# Altium PCB PCB_CONTROL.PcbDoc (part 4 of 15)
Units mil, origin at the board's own origin, x right, y up, seen from the top; angles counter-clockwise.
Board outline 7360.03 x 4773.15 mil, 2 copper layers (Top Layer, Bottom Layer); 73 components, 135 nets, 396 pads, 106 vias.
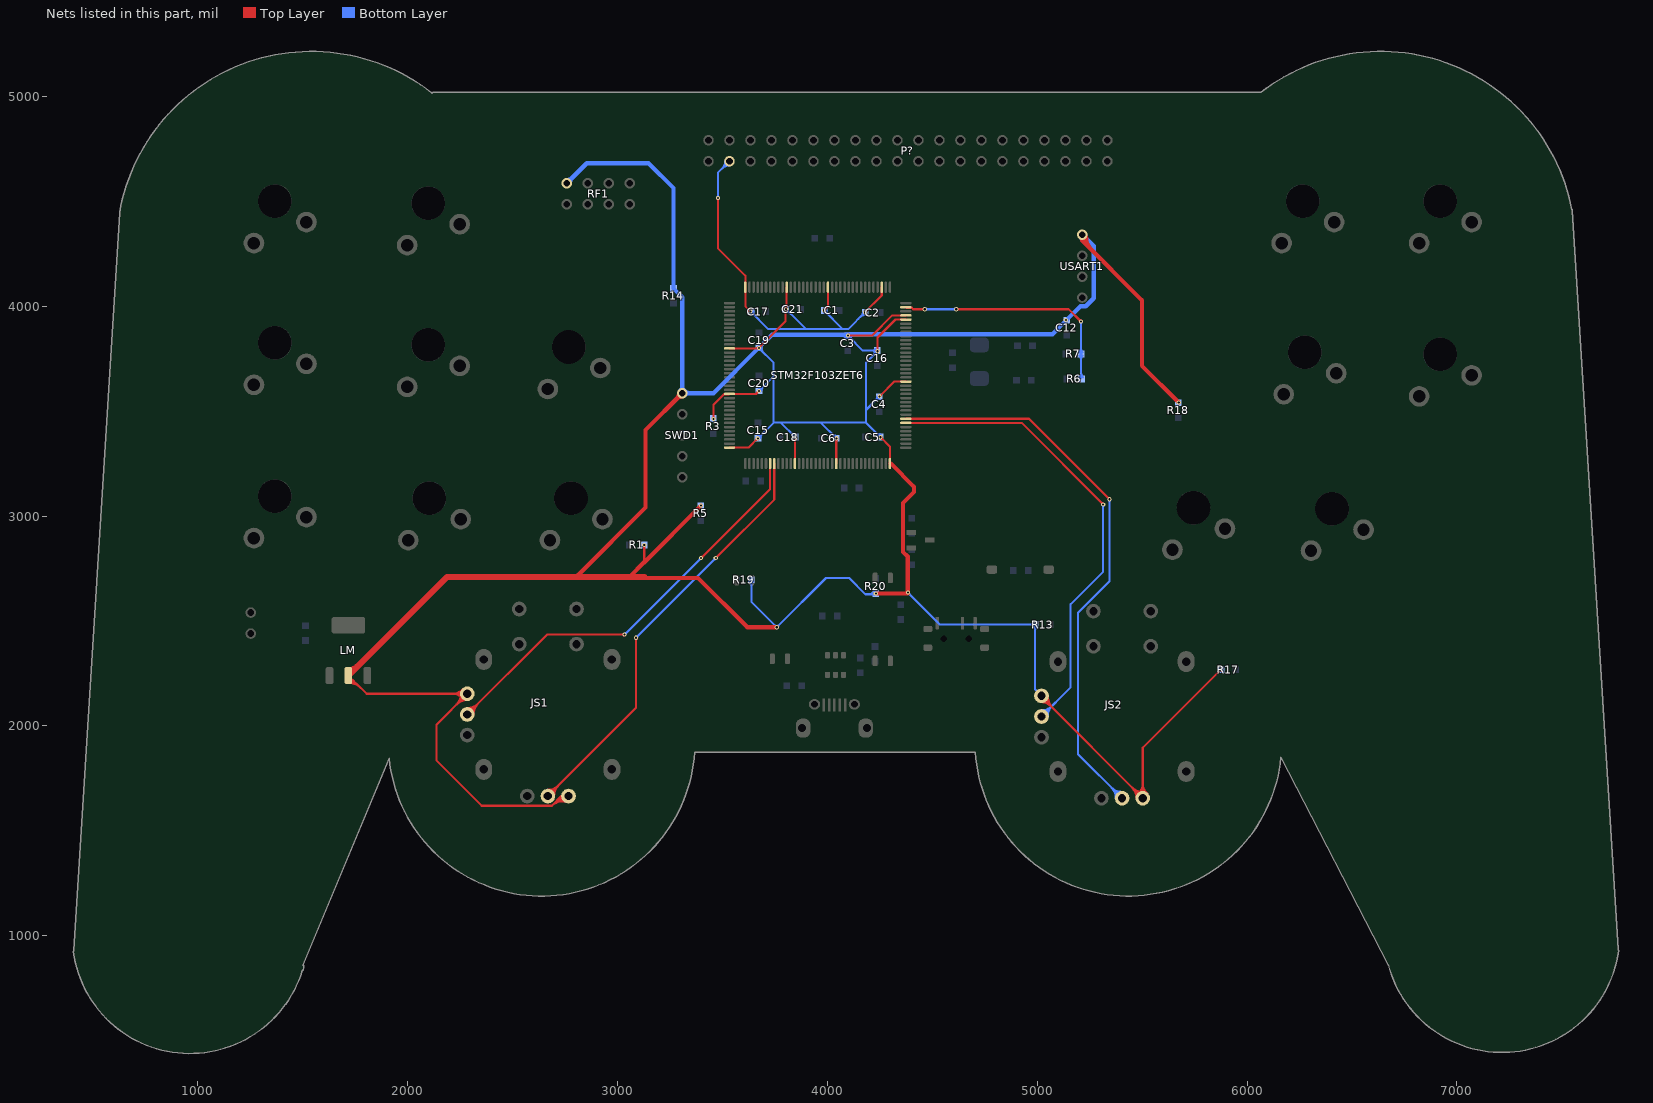
[diagram p4: the nets of this part, all layers, seen from the top]

## Via types
v1: diameter 20, hole 10, Top Layer to Bottom Layer, 104 vias
v2: diameter 30, hole 20, Top Layer to Bottom Layer, 2 vias

## Nets (pads, with @x,y where several pads share a name; then routed paths per layer and width w, separated by ;. In a path a pad name is that pad's centre, name@x,y a point inside that pad or via, vN(x,y) a via of type N, cw(c..) or ccw(c..) an arc to the next point about the centre after c; other vN are vias at no path point) (continued)
3V3: (continued)
  Bottom Layer w10: 4235.93,3394.07 ccw(c4253,3411.14) C5.1@4253,3387 ; 4235.93,3394.07 ccw(c4253,3411.14) C5.1@4253,3387 ; 4235.93,3394.07 ccw(c4253,3411.14) C5.1@4253,3387 ; 4235.93,3394.07 ccw(c4253,3411.14) C5.1@4253,3387 ; 4235.93,3394.07 ccw(c4253,3411.14) C5.1@4253,3387 ; 4235.93,3394.07 ccw(c4253,3411.14) C5.1@4253,3387 ; 4235.93,3394.07 ccw(c4253,3411.14) C5.1@4253,3387 ; 4235.93,3394.07 ccw(c4253,3411.14) C5.1@4253,3387 ; 4235.93,3394.07 ccw(c4253,3411.14) C5.1@4253,3387 ; 4235.93,3394.07 ccw(c4253,3411.14) C5.1@4253,3387 ; 4235.93,3394.07 ccw(c4253,3411.14) C5.1@4253,3387 ; 4235.93,3394.07 ccw(c4253,3411.14) C5.1@4253,3387 ; 4235.93,3394.07 ccw(c4253,3411.14) C5.1@4253,3387 ; 4235.93,3394.07 ccw(c4253,3411.14) C5.1@4253,3387 ; 4235.93,3394.07 ccw(c4253,3411.14) C5.1@4253,3387 ; 4235.93,3394.07 ccw(c4253,3411.14) C5.1@4253,3387 ; 4235.93,3394.07 ccw(c4253,3411.14) C5.1@4253,3387 ; 4235.93,3394.07 ccw(c4253,3411.14) C5.1@4253,3387 ; 4235.93,3394.07 ccw(c4253,3411.14) C5.1@4253,3387 ; 4235.93,3394.07 ccw(c4253,3411.14) C5.1@4253,3387 ; 4235.93,3394.07 ccw(c4253,3411.14) C5.1@4253,3387 ; 4235.93,3394.07 ccw(c4253,3411.14) C5.1@4253,3387 ; 4235.93,3394.07 ccw(c4253,3411.14) C5.1@4253,3387 ; 4235.93,3394.07 ccw(c4253,3411.14) C5.1@4253,3387 ; 4235.93,3394.07 ccw(c4253,3411.14) C5.1@4253,3387 ; 4235.93,3394.07 ccw(c4253,3411.14) C5.1@4253,3387 ; 4235.93,3394.07 ccw(c4253,3411.14) C5.1@4253,3387 ; 4235.93,3394.07 ccw(c4253,3411.14) C5.1@4253,3387 ; 4235.93,3394.07 ccw(c4253,3411.14) C5.1@4253,3387 ; 4235.93,3394.07 ccw(c4253,3411.14) C5.1@4253,3387 ; 4235.93,3394.07 ccw(c4253,3411.14) C5.1@4253,3387 ; 4235.93,3394.07 ccw(c4253,3411.14) C5.1@4253,3387 ; C4.1@4241.46,3561.46 cw(c4250,3552.93) C4.1@4250,3565 ; C4.1@4241.46,3561.46 ccw(c4232.93,3570) C4.1@4245,3570 ; C4.1@4241.46,3561.46 cw(c4250,3552.93) C4.1@4250,3565 ; C4.1@4241.46,3561.46 ccw(c4232.93,3570) C4.1@4245,3570 ; C4.1@4241.46,3561.46 cw(c4250,3552.93) C4.1@4250,3565 ; C4.1@4241.46,3561.46 ccw(c4232.93,3570) C4.1@4245,3570 ; C4.1@4241.46,3561.46 cw(c4250,3552.93) C4.1@4250,3565 ; C4.1@4241.46,3561.46 ccw(c4232.93,3570) C4.1@4245,3570 ; C4.1@4241.46,3561.46 ccw(c4232.93,3570) C4.1@4245,3570 ; C4.1@4241.46,3561.46 cw(c4250,3552.93) C4.1@4250,3565 ; C4.1@4241.46,3561.46 ccw(c4232.93,3570) C4.1@4245,3570 ; C4.1@4241.46,3561.46 cw(c4250,3552.93) C4.1@4250,3565 ; C4.1@4241.46,3561.46 ccw(c4232.93,3570) C4.1@4245,3570 ; C4.1@4241.46,3561.46 cw(c4250,3552.93) C4.1@4250,3565 ; C4.1@4241.46,3561.46 ccw(c4232.93,3570) C4.1@4245,3570 ; C4.1@4241.46,3561.46 cw(c4250,3552.93) C4.1@4250,3565 ; C4.1@4241.46,3561.46 ccw(c4232.93,3570) C4.1@4245,3570 ; C4.1@4241.46,3561.46 cw(c4250,3552.93) C4.1@4250,3565 ; C4.1@4241.46,3561.46 ccw(c4232.93,3570) C4.1@4245,3570 ; C4.1@4241.46,3561.46 cw(c4250,3552.93) C4.1@4250,3565 ; C4.1@4241.46,3561.46 ccw(c4232.93,3570) C4.1@4245,3570 ; C4.1@4241.46,3561.46 cw(c4250,3552.93) C4.1@4250,3565 ; C4.1@4241.46,3561.46 ccw(c4232.93,3570) C4.1@4245,3570 ; C4.1@4241.46,3561.46 cw(c4250,3552.93) C4.1@4250,3565 ; C4.1@4241.46,3561.46 ccw(c4232.93,3570) C4.1@4245,3570 ; C4.1@4241.46,3561.46 cw(c4250,3552.93) C4.1@4250,3565 ; C4.1@4241.46,3561.46 ccw(c4232.93,3570) C4.1@4245,3570 ; C4.1@4241.46,3561.46 cw(c4250,3552.93) C4.1@4250,3565 ; C4.1@4241.46,3561.46 ccw(c4232.93,3570) C4.1@4245,3570 ; C4.1@4241.46,3561.46 cw(c4250,3552.93) C4.1@4250,3565 ; C4.1@4241.46,3561.46 ccw(c4232.93,3570) C4.1@4245,3570 ; C4.1@4241.46,3561.46 cw(c4250,3552.93) C4.1@4250,3565 ; C4.1@4241.46,3561.46 ccw(c4232.93,3570) C4.1@4245,3570 ; C4.1@4241.46,3561.46 cw(c4250,3552.93) C4.1@4250,3565 ; C4.1@4241.46,3561.46 ccw(c4232.93,3570) C4.1@4245,3570 ; C4.1@4241.46,3561.46 cw(c4250,3552.93) C4.1@4250,3565 ; C4.1@4241.46,3561.46 ccw(c4232.93,3570) C4.1@4245,3570 ; C4.1@4241.46,3561.46 cw(c4250,3552.93) C4.1@4250,3565 ; C4.1@4241.46,3561.46 ccw(c4232.93,3570) C4.1@4245,3570 ; C4.1@4241.46,3561.46 cw(c4250,3552.93) C4.1@4250,3565 ; C4.1@4241.46,3561.46 ccw(c4232.93,3570) C4.1@4245,3570 ; C4.1@4241.46,3561.46 cw(c4250,3552.93) C4.1@4250,3565 ; C4.1@4241.46,3561.46 ccw(c4232.93,3570) C4.1@4245,3570 ; C4.1@4241.46,3561.46 cw(c4250,3552.93) C4.1@4250,3565 ; C4.1@4241.46,3561.46 ccw(c4232.93,3570) C4.1@4245,3570 ; C4.1@4241.46,3561.46 cw(c4250,3552.93) C4.1@4250,3565 ; C4.1@4241.46,3561.46 ccw(c4232.93,3570) C4.1@4245,3570 ; C4.1@4241.46,3561.46 cw(c4250,3552.93) C4.1@4250,3565 ; C4.1@4241.46,3561.46 ccw(c4232.93,3570) C4.1@4245,3570 ; C4.1@4241.46,3561.46 cw(c4250,3552.93) C4.1@4250,3565 ; C4.1@4241.46,3561.46 ccw(c4232.93,3570) C4.1@4245,3570 ; C4.1@4241.46,3561.46 cw(c4250,3552.93) C4.1@4250,3565 ; C4.1@4241.46,3561.46 ccw(c4232.93,3570) C4.1@4245,3570 ; C4.1@4241.46,3561.46 cw(c4250,3552.93) C4.1@4250,3565 ; C4.1@4241.46,3561.46 ccw(c4232.93,3570) C4.1@4245,3570 ; C4.1@4241.46,3561.46 cw(c4250,3552.93) C4.1@4250,3565 ; C4.1@4241.46,3561.46 ccw(c4232.93,3570) C4.1@4245,3570 ; C4.1@4241.46,3561.46 cw(c4250,3552.93) C4.1@4250,3565 ; C4.1@4241.46,3561.46 ccw(c4232.93,3570) C4.1@4245,3570 ; C4.1@4241.46,3561.46 cw(c4250,3552.93) C4.1@4250,3565 ; C4.1@4241.46,3561.46 ccw(c4232.93,3570) C4.1@4245,3570 ; C4.1@4241.46,3561.46 cw(c4250,3552.93) C4.1@4250,3565 ; C4.1@4241.46,3561.46 ccw(c4232.93,3570) C4.1@4245,3570 ; C4.1@4241.46,3561.46 cw(c4250,3552.93) C4.1@4250,3565 ; C4.1@4241.46,3561.46 ccw(c4232.93,3570) C4.1@4245,3570 ; C4.1@4241.46,3561.46 cw(c4250,3552.93) C4.1@4250,3565 ; C4.1@4241.46,3561.46 ccw(c4232.93,3570) C4.1@4245,3570 ; C4.1@4241.46,3561.46 cw(c4250,3552.93) C4.1@4250,3565 ; C4.1@4241.46,3561.46 ccw(c4232.93,3570) C4.1@4245,3570 ; C4.1@4241.46,3561.46 cw(c4250,3552.93) C4.1@4250,3565 ; C4.1@4241.46,3561.46 ccw(c4232.93,3570) C4.1@4245,3570 ; C4.1@4241.46,3561.46 cw(c4250,3552.93) C4.1@4250,3565 ; C5.1@4246.46,3383.54 cw(c4237.93,3375) C5.1@4250,3375 ; C5.1@4246.46,3383.54 ccw(c4255,3392.07) C5.1@4255,3380 ; C5.1@4246.46,3383.54 cw(c4237.93,3375) C5.1@4250,3375 ; C5.1@4246.46,3383.54 ccw(c4255,3392.07) C5.1@4255,3380 ; C5.1@4246.46,3383.54 cw(c4237.93,3375) C5.1@4250,3375 ; C5.1@4246.46,3383.54 ccw(c4255,3392.07) C5.1@4255,3380 ; C5.1@4246.46,3383.54 cw(c4237.93,3375) C5.1@4250,3375 ; C5.1@4246.46,3383.54 ccw(c4255,3392.07) C5.1@4255,3380 ; C5.1@4246.46,3383.54 ccw(c4255,3392.07) C5.1@4255,3380 ; C5.1@4246.46,3383.54 cw(c4237.93,3375) C5.1@4250,3375 ; C5.1@4246.46,3383.54 ccw(c4255,3392.07) C5.1@4255,3380 ; C5.1@4246.46,3383.54 cw(c4237.93,3375) C5.1@4250,3375 ; C5.1@4246.46,3383.54 ccw(c4255,3392.07) C5.1@4255,3380 ; C5.1@4246.46,3383.54 cw(c4237.93,3375) C5.1@4250,3375 ; C5.1@4246.46,3383.54 ccw(c4255,3392.07) C5.1@4255,3380 ; C5.1@4246.46,3383.54 cw(c4237.93,3375) C5.1@4250,3375 ; C5.1@4246.46,3383.54 ccw(c4255,3392.07) C5.1@4255,3380 ; C5.1@4246.46,3383.54 cw(c4237.93,3375) C5.1@4250,3375 ; C5.1@4246.46,3383.54 ccw(c4255,3392.07) C5.1@4255,3380 ; C5.1@4246.46,3383.54 cw(c4237.93,3375) C5.1@4250,3375 ; C5.1@4246.46,3383.54 ccw(c4255,3392.07) C5.1@4255,3380 ; C5.1@4246.46,3383.54 cw(c4237.93,3375) C5.1@4250,3375 ; C5.1@4246.46,3383.54 ccw(c4255,3392.07) C5.1@4255,3380 ; C5.1@4246.46,3383.54 cw(c4237.93,3375) C5.1@4250,3375 ; C5.1@4246.46,3383.54 ccw(c4255,3392.07) C5.1@4255,3380 ; C5.1@4246.46,3383.54 cw(c4237.93,3375) C5.1@4250,3375 ; C5.1@4246.46,3383.54 ccw(c4255,3392.07) C5.1@4255,3380 ; C5.1@4246.46,3383.54 cw(c4237.93,3375) C5.1@4250,3375 ; C5.1@4246.46,3383.54 ccw(c4255,3392.07) C5.1@4255,3380 ; C5.1@4246.46,3383.54 cw(c4237.93,3375) C5.1@4250,3375 ; C5.1@4246.46,3383.54 ccw(c4255,3392.07) C5.1@4255,3380 ; C5.1@4246.46,3383.54 cw(c4237.93,3375) C5.1@4250,3375 ; C5.1@4246.46,3383.54 ccw(c4255,3392.07) C5.1@4255,3380 ; C5.1@4246.46,3383.54 cw(c4237.93,3375) C5.1@4250,3375 ; C5.1@4246.46,3383.54 ccw(c4255,3392.07) C5.1@4255,3380 ; C5.1@4246.46,3383.54 cw(c4237.93,3375) C5.1@4250,3375 ; C5.1@4246.46,3383.54 ccw(c4255,3392.07) C5.1@4255,3380 ; C5.1@4246.46,3383.54 cw(c4237.93,3375) C5.1@4250,3375 ; C5.1@4246.46,3383.54 ccw(c4255,3392.07) C5.1@4255,3380 ; C5.1@4246.46,3383.54 cw(c4237.93,3375) C5.1@4250,3375 ; C5.1@4246.46,3383.54 ccw(c4255,3392.07) C5.1@4255,3380 ; C5.1@4246.46,3383.54 cw(c4237.93,3375) C5.1@4250,3375 ; C5.1@4246.46,3383.54 ccw(c4255,3392.07) C5.1@4255,3380 ; C5.1@4246.46,3383.54 cw(c4237.93,3375) C5.1@4250,3375 ; C5.1@4246.46,3383.54 ccw(c4255,3392.07) C5.1@4255,3380 ; C5.1@4246.46,3383.54 cw(c4237.93,3375) C5.1@4250,3375 ; C5.1@4246.46,3383.54 ccw(c4255,3392.07) C5.1@4255,3380 ; C5.1@4246.46,3383.54 cw(c4237.93,3375) C5.1@4250,3375 ; C5.1@4246.46,3383.54 ccw(c4255,3392.07) C5.1@4255,3380 ; C5.1@4246.46,3383.54 cw(c4237.93,3375) C5.1@4250,3375 ; C5.1@4246.46,3383.54 ccw(c4255,3392.07) C5.1@4255,3380 ; C5.1@4246.46,3383.54 cw(c4237.93,3375) C5.1@4250,3375 ; C5.1@4246.46,3383.54 ccw(c4255,3392.07) C5.1@4255,3380 ; C5.1@4246.46,3383.54 cw(c4237.93,3375) C5.1@4250,3375 ; C5.1@4246.46,3383.54 ccw(c4255,3392.07) C5.1@4255,3380 ; C5.1@4246.46,3383.54 cw(c4237.93,3375) C5.1@4250,3375 ; C5.1@4246.46,3383.54 ccw(c4255,3392.07) C5.1@4255,3380 ; C5.1@4246.46,3383.54 cw(c4237.93,3375) C5.1@4250,3375 ; C5.1@4246.46,3383.54 ccw(c4255,3392.07) C5.1@4255,3380 ; C5.1@4246.46,3383.54 cw(c4237.93,3375) C5.1@4250,3375 ; C5.1@4246.46,3383.54 ccw(c4255,3392.07) C5.1@4255,3380 ; C5.1@4246.46,3383.54 cw(c4237.93,3375) C5.1@4250,3375 ; C5.1@4246.46,3383.54 ccw(c4255,3392.07) C5.1@4255,3380 ; C5.1@4246.46,3383.54 cw(c4237.93,3375) C5.1@4250,3375 ; C5.1@4246.46,3383.54 ccw(c4255,3392.07) C5.1@4255,3380 ; C5.1@4246.46,3383.54 cw(c4237.93,3375) C5.1@4250,3375 ; C5.1@4246.46,3383.54 ccw(c4255,3392.07) C5.1@4255,3380 ; C5.1@4246.46,3383.54 cw(c4237.93,3375) C5.1@4250,3375 ; C5.1@4246.46,3383.54 ccw(c4255,3392.07) C5.1@4255,3380 ; C5.1@4246.46,3383.54 cw(c4237.93,3375) C5.1@4250,3375 ; C5.1@4246.46,3383.54 ccw(c4255,3392.07) C5.1@4255,3380 ; C5.1@4246.46,3383.54 cw(c4237.93,3375) C5.1@4250,3375
  Bottom Layer w20: RF1.2@2760,4585 2855,4680 3150,4680 3268,4562 R14.2@3268,4084 3310,4042 SWD1.1@3310,3585 3459,3585 C19.1@3676,3802 3737.54,3863.54 C3.1@4100,3863.54 ; C3.1@4099,3858 C3.1@4099.77,3858.77 ; C3.1@4100.5,3859.5 4107,3866 5074,3866 C12.2@5141,3933 5207,3999 5231.98,3999 5270,4037.02 5270,4285.91 5215.91,4340 USART1.1@5215,4340 ; RF1.2@2760,4600 ccw(c2760,4636.21) 2785.61,4610.61 ; RF1.2@2760,4600 ccw(c2760,4636.21) 2785.61,4610.61 ; RF1.2@2760,4600 ccw(c2760,4636.21) 2785.61,4610.61 ; RF1.2@2760,4600 ccw(c2760,4636.21) 2785.61,4610.61 ; RF1.2@2775,4585 cw(c2811.21,4585) 2785.61,4610.61 ; RF1.2@2775,4585 cw(c2811.21,4585) 2785.61,4610.61 ; RF1.2@2775,4585 cw(c2811.21,4585) 2785.61,4610.61 ; RF1.2@2775,4585 cw(c2811.21,4585) 2785.61,4610.61 ; SWD1.1@3299.39,3595.61 ccw(c3273.79,3621.21) 3310,3621.21 ; SWD1.1@3299.39,3595.61 ccw(c3273.79,3621.21) 3310,3621.21 ; SWD1.1@3299.39,3595.61 ccw(c3273.79,3621.21) 3310,3621.21 ; SWD1.1@3299.39,3595.61 ccw(c3273.79,3621.21) 3310,3621.21 ; SWD1.1@3299.39,3595.61 ccw(c3273.79,3621.21) 3310,3621.21 ; SWD1.1@3299.39,3595.61 ccw(c3273.79,3621.21) 3310,3621.21 ; SWD1.1@3299.39,3595.61 ccw(c3273.79,3621.21) 3310,3621.21 ; 3310,3621.21 ccw(c3346.21,3621.21) SWD1.1@3320.61,3595.61 ; 3310,3621.21 ccw(c3346.21,3621.21) SWD1.1@3320.61,3595.61 ; 3310,3621.21 ccw(c3346.21,3621.21) SWD1.1@3320.61,3595.61 ; 3310,3621.21 ccw(c3346.21,3621.21) SWD1.1@3320.61,3595.61 ; 3310,3621.21 ccw(c3346.21,3621.21) SWD1.1@3320.61,3595.61 ; 3310,3621.21 ccw(c3346.21,3621.21) SWD1.1@3320.61,3595.61 ; 3310,3621.21 ccw(c3346.21,3621.21) SWD1.1@3320.61,3595.61 ; SWD1.1@3320.61,3574.39 cw(c3346.21,3548.79) 3346.21,3585 ; SWD1.1@3320.61,3574.39 cw(c3346.21,3548.79) 3346.21,3585 ; SWD1.1@3320.61,3574.39 cw(c3346.21,3548.79) 3346.21,3585 ; SWD1.1@3320.61,3574.39 cw(c3346.21,3548.79) 3346.21,3585 ; SWD1.1@3320.61,3574.39 cw(c3346.21,3548.79) 3346.21,3585 ; SWD1.1@3320.61,3574.39 cw(c3346.21,3548.79) 3346.21,3585 ; SWD1.1@3320.61,3574.39 cw(c3346.21,3548.79) 3346.21,3585 ; SWD1.1@3320.61,3595.61 ccw(c3346.21,3621.21) 3346.21,3585 ; SWD1.1@3320.61,3595.61 ccw(c3346.21,3621.21) 3346.21,3585 ; SWD1.1@3320.61,3595.61 ccw(c3346.21,3621.21) 3346.21,3585 ; SWD1.1@3320.61,3595.61 ccw(c3346.21,3621.21) 3346.21,3585 ; SWD1.1@3320.61,3595.61 ccw(c3346.21,3621.21) 3346.21,3585 ; SWD1.1@3320.61,3595.61 ccw(c3346.21,3621.21) 3346.21,3585 ; SWD1.1@3320.61,3595.61 ccw(c3346.21,3621.21) 3346.21,3585 ; 4071.15,3863.54 cw(c4071.15,3830.15) C3.1@4094.76,3853.76 ; 4071.15,3863.54 cw(c4071.15,3830.15) C3.1@4094.76,3853.76 ; 4071.15,3863.54 cw(c4071.15,3830.15) C3.1@4094.76,3853.76 ; 4071.15,3863.54 cw(c4071.15,3830.15) C3.1@4094.76,3853.76 ; 4071.15,3863.54 cw(c4071.15,3830.15) C3.1@4094.76,3853.76 ; 4071.15,3863.54 cw(c4071.15,3830.15) C3.1@4094.76,3853.76 ; 4071.15,3863.54 cw(c4071.15,3830.15) C3.1@4094.76,3853.76 ; C3.1@4083.81,3860.08 ccw(c4091.97,3874.23) v1(4100,3860) ; C3.1@4083.81,3860.08 ccw(c4091.97,3874.23) v1(4100,3860) ; C3.1@4083.81,3860.08 ccw(c4091.97,3874.23) v1(4100,3860) ; C3.1@4083.81,3860.08 ccw(c4091.97,3874.23) v1(4100,3860) ; C3.1@4083.81,3860.08 ccw(c4091.97,3874.23) v1(4100,3860) ; C3.1@4083.81,3860.08 ccw(c4091.97,3874.23) v1(4100,3860) ; C3.1@4083.81,3860.08 ccw(c4091.97,3874.23) v1(4100,3860) ; C3.1@4083.81,3860.08 ccw(c4091.97,3874.23) v1(4100,3860) ; C3.1@4083.81,3860.08 ccw(c4091.97,3874.23) v1(4100,3860) ; C3.1@4083.81,3860.08 ccw(c4091.97,3874.23) v1(4100,3860) ; C3.1@4083.81,3860.08 ccw(c4091.97,3874.23) v1(4100,3860) ; C3.1@4083.81,3860.08 ccw(c4091.97,3874.23) v1(4100,3860) ; C3.1@4083.81,3860.08 ccw(c4091.97,3874.23) v1(4100,3860) ; C3.1@4083.81,3860.08 ccw(c4091.97,3874.23) v1(4100,3860) ; C3.1@4083.81,3860.08 ccw(c4091.97,3874.23) v1(4100,3860) ; C3.1@4083.81,3860.08 ccw(c4091.97,3874.23) v1(4100,3860) ; C3.1@4083.81,3860.08 ccw(c4091.97,3874.23) v1(4100,3860) ; C3.1@4083.81,3860.08 ccw(c4091.97,3874.23) v1(4100,3860) ; C3.1@4083.81,3860.08 ccw(c4091.97,3874.23) v1(4100,3860) ; C3.1@4083.81,3860.08 ccw(c4091.97,3874.23) v1(4100,3860) ; C3.1@4083.81,3860.08 ccw(c4091.97,3874.23) v1(4100,3860) ; C3.1@4083.81,3860.08 ccw(c4091.97,3874.23) v1(4100,3860) ; C3.1@4083.81,3860.08 ccw(c4091.97,3874.23) v1(4100,3860) ; C3.1@4083.81,3860.08 ccw(c4091.97,3874.23) v1(4100,3860) ; C3.1@4083.81,3860.08 ccw(c4091.97,3874.23) v1(4100,3860) ; C3.1@4083.81,3860.08 ccw(c4091.97,3874.23) v1(4100,3860) ; C3.1@4083.81,3860.08 ccw(c4091.97,3874.23) v1(4100,3860) ; C3.1@4083.81,3860.08 ccw(c4091.97,3874.23) v1(4100,3860) ; v1(4100,3860) cw(c4114.49,3845.51) C3.1@4114.49,3866 ; v1(4100,3860) ccw(c4106.21,3883.18) 4118.21,3862.4 ; v1(4100,3860) ccw(c4106.21,3883.18) 4118.21,3862.4 ; v1(4100,3860) ccw(c4106.21,3883.18) 4118.21,3862.4 ; v1(4100,3860) ccw(c4106.21,3883.18) 4118.21,3862.4 ; v1(4100,3860) ccw(c4106.21,3883.18) 4118.21,3862.4 ; v1(4100,3860) ccw(c4106.21,3883.18) 4118.21,3862.4 ; v1(4100,3860) ccw(c4106.21,3883.18) 4118.21,3862.4 ; v1(4100,3860) ccw(c4106.21,3883.18) 4118.21,3862.4 ; v1(4100,3860) cw(c4114.49,3845.51) C3.1@4114.49,3866 ; v1(4100,3860) ccw(c4106.21,3883.18) 4118.21,3862.4 ; v1(4100,3860) ccw(c4106.21,3883.18) 4118.21,3862.4 ; v1(4100,3860) cw(c4114.49,3845.51) C3.1@4114.49,3866 ; v1(4100,3860) ccw(c4106.21,3883.18) 4118.21,3862.4 ; v1(4100,3860) ccw(c4106.21,3883.18) 4118.21,3862.4 ; v1(4100,3860) ccw(c4106.21,3883.18) 4118.21,3862.4 ; v1(4100,3860) cw(c4114.49,3845.51) C3.1@4114.49,3866 ; v1(4100,3860) ccw(c4106.21,3883.18) 4118.21,3862.4 ; v1(4100,3860) ccw(c4106.21,3883.18) 4118.21,3862.4 ; v1(4100,3860) ccw(c4106.21,3883.18) 4118.21,3862.4 ; v1(4100,3860) ccw(c4106.21,3883.18) 4118.21,3862.4 ; v1(4100,3860) cw(c4114.49,3845.51) C3.1@4114.49,3866 ; v1(4100,3860) ccw(c4106.21,3883.18) 4118.21,3862.4 ; v1(4100,3860) ccw(c4106.21,3883.18) 4118.21,3862.4 ; v1(4100,3860) ccw(c4106.21,3883.18) 4118.21,3862.4 ; v1(4100,3860) ccw(c4106.21,3883.18) 4118.21,3862.4 ; v1(4100,3860) ccw(c4106.21,3883.18) 4118.21,3862.4 ; v1(4100,3860) cw(c4114.49,3845.51) C3.1@4114.49,3866 ; v1(4100,3860) ccw(c4106.21,3883.18) 4118.21,3862.4 ; v1(4100,3860) ccw(c4106.21,3883.18) 4118.21,3862.4 ; v1(4100,3860) ccw(c4106.21,3883.18) 4118.21,3862.4 ; v1(4100,3860) ccw(c4106.21,3883.18) 4118.21,3862.4 ; v1(4100,3860) ccw(c4106.21,3883.18) 4118.21,3862.4 ; v1(4100,3860) ccw(c4106.21,3883.18) 4118.21,3862.4 ; v1(4100,3860) cw(c4114.49,3845.51) C3.1@4114.49,3866 ; C3.1@4102.13,3863.12 ccw(c4110.79,3877.27) 4119.08,3862.9 ; C3.1@4102.13,3863.12 ccw(c4110.79,3877.27) 4119.08,3862.9 ; C3.1@4102.13,3863.12 ccw(c4110.79,3877.27) 4119.08,3862.9 ; C3.1@4102.13,3863.12 ccw(c4110.79,3877.27) 4119.08,3862.9 ; C3.1@4102.13,3863.12 ccw(c4110.79,3877.27) 4119.08,3862.9 ; C3.1@4102.13,3863.12 ccw(c4110.79,3877.27) 4119.08,3862.9 ; C3.1@4102.13,3863.12 ccw(c4110.79,3877.27) 4119.08,3862.9 ; C3.1@4102.13,3863.12 ccw(c4110.79,3877.27) 4119.08,3862.9 ; C3.1@4102.13,3863.12 ccw(c4110.79,3877.27) 4119.08,3862.9 ; C3.1@4102.13,3863.12 ccw(c4110.79,3877.27) 4119.08,3862.9 ; C3.1@4102.13,3863.12 ccw(c4110.79,3877.27) 4119.08,3862.9 ; C3.1@4102.13,3863.12 ccw(c4110.79,3877.27) 4119.08,3862.9 ; C3.1@4102.13,3863.12 ccw(c4110.79,3877.27) 4119.08,3862.9 ; C3.1@4102.13,3863.12 ccw(c4110.79,3877.27) 4119.08,3862.9 ; C3.1@4102.13,3863.12 ccw(c4110.79,3877.27) 4119.08,3862.9 ; C3.1@4102.13,3863.12 ccw(c4110.79,3877.27) 4119.08,3862.9 ; C3.1@4102.13,3863.12 ccw(c4110.79,3877.27) 4119.08,3862.9 ; C3.1@4102.13,3863.12 ccw(c4110.79,3877.27) 4119.08,3862.9 ; C3.1@4102.13,3863.12 ccw(c4110.79,3877.27) 4119.08,3862.9 ; C3.1@4103.24,3853.76 cw(c4132.8,3824.2) 4132.8,3866 ; C3.1@4103.24,3853.76 cw(c4132.8,3824.2) 4132.8,3866 ; C3.1@4103.24,3853.76 cw(c4132.8,3824.2) 4132.8,3866 ; C3.1@4103.24,3853.76 cw(c4132.8,3824.2) 4132.8,3866 ; C3.1@4103.24,3853.76 cw(c4132.8,3824.2) 4132.8,3866 ; C3.1@4103.24,3853.76 cw(c4132.8,3824.2) 4132.8,3866 ; C3.1@4103.24,3853.76 cw(c4132.8,3824.2) 4132.8,3866 ; USART1.1@5215,4325 cw(c5215,4286.59) 5242.16,4313.75 ; USART1.1@5215,4325 cw(c5215,4286.59) 5242.16,4313.75 ; USART1.1@5215,4325 cw(c5215,4286.59) 5242.16,4313.75 ; USART1.1@5215,4325 cw(c5215,4286.59) 5242.16,4313.75 ; USART1.1@5230,4340 ccw(c5264.01,4340) 5239.96,4315.95 ; USART1.1@5230,4340 ccw(c5264.01,4340) 5239.96,4315.95 ; USART1.1@5230,4340 ccw(c5264.01,4340) 5239.96,4315.95 ; USART1.1@5230,4340 ccw(c5264.01,4340) 5239.96,4315.95
  other v1: 5137,3933
AD_LEFT1: JS2.5 STM32F103ZET6.8 | length 2929.3
  Top Layer w10: STM32F103ZET6.8@4375,3463.31 4961.69,3463.31 v1(5345,3080) ; v1@5340,3080 ccw(c5327.93,3080) 5336.46,3088.54 ccw(c5345,3097.07) v1@5345,3085
  Bottom Layer w10: v1@5341.46,3076.46 cw(c5332.93,3067.93) 5345,3067.93 cw(c5357.07,3067.93) v1@5348.54,3076.46 ; v1(5345,3080) 5345,2690 5195,2540 5195,1866.14 JS2.5@5405,1656.14 ; JS2.5@5375,1656.14 ccw(c5302.57,1656.14) 5353.79,1707.35 ccw(c5405,1758.57) JS2.5@5405,1686.14 ; JS2.5@5385,1656.14 ccw(c5336.72,1656.14) 5370.86,1690.28 ccw(c5405,1724.43) JS2.5@5405,1676.14
AD_LEFT2: JS2.2 STM32F103ZET6.7 | length 2460.2
  Top Layer w10: STM32F103ZET6.7@4375,3443.62 4926.38,3443.62 v1(5315,3055) ; v1@5310,3055 ccw(c5297.93,3055) 5306.46,3063.54 ccw(c5315,3072.07) v1@5315,3060
  Bottom Layer w10: JS2.2@5021.14,2045 5160,2183.86 5160,2580 5315,2735 v1(5315,3055) ; JS2.2@5021.14,2065 ccw(c5021.14,2113.28) 5055.28,2079.14 ccw(c5089.43,2045) JS2.2@5041.14,2045 ; JS2.2@5021.14,2075 ccw(c5021.14,2147.43) 5072.35,2096.21 ccw(c5123.57,2045) JS2.2@5051.14,2045 ; v1@5311.46,3051.46 cw(c5302.93,3042.93) 5315,3042.93 cw(c5327.07,3042.93) v1@5318.54,3051.46
AD_RIGHT1: JS1.5 STM32F103ZET6.116 | length 2296
  Top Layer w10: JS1.5@2670,1666.14 3090,2086.14 v1(3090,2420) ; JS1.5@2670,1686.14 ccw(c2670,1734.43) 2704.14,1700.28 ccw(c2738.28,1666.14) JS1.5@2690,1666.14 ; JS1.5@2670,1696.14 ccw(c2670,1768.57) 2721.21,1717.35 ccw(c2772.43,1666.14) JS1.5@2700,1666.14 ; v1@3086.46,2416.46 cw(c3077.93,2407.93) 3090,2407.93 cw(c3102.07,2407.93) v1@3093.54,2416.46 ; v1(3470,2800) 3748.31,3078.31 STM32F103ZET6.116@3748.31,3250 ; v1@3470,2805 ccw(c3470,2817.07) 3478.54,2808.54 ccw(c3487.07,2800) v1@3475,2800
  Bottom Layer w10: v1(3090,2420) v1(3470,2800) ; v1@3090,2425 ccw(c3090,2437.07) 3098.54,2428.54 ccw(c3107.07,2420) v1@3095,2420 ; v1@3465,2800 cw(c3452.93,2800) 3461.46,2791.46 cw(c3470,2782.93) v1@3470,2795
AD_RIGHT2: JS1.2 STM32F103ZET6.115 | length 2274.7
  Top Layer w10: JS1.2@2286.14,2055 2666.94,2435.8 3034.2,2435.8 v1(3035,2435) ; JS1.2@2286.14,2075 ccw(c2286.14,2123.28) 2320.28,2089.14 ccw(c2354.43,2055) JS1.2@2306.14,2055 ; JS1.2@2286.14,2085 ccw(c2286.14,2157.43) 2337.35,2106.21 ccw(c2388.57,2055) JS1.2@2316.14,2055 ; 3020.99,2435.8 cw(c3020.99,2420.99) v1@3031.46,2431.46 ; 3024.87,2435.8 ccw(c3024.87,2445.13) v1@3031.46,2438.54 ; v1(3400,2800) 3728.62,3128.62 STM32F103ZET6.115@3728.62,3250 ; v1@3400,2805 ccw(c3400,2817.07) 3408.54,2808.54 ccw(c3417.07,2800) v1@3405,2800
  Bottom Layer w10: v1(3035,2435) v1(3400,2800) ; v1@3035,2440 ccw(c3035,2452.07) 3043.54,2443.54 ccw(c3052.07,2435) v1@3040,2435 ; v1@3395,2800 cw(c3382.93,2800) 3391.46,2791.46 cw(c3400,2782.93) v1@3400,2795
BAT_V: R6.1 R7.2 STM32F103ZET6.35 | length 2312.6
  Top Layer w10: STM32F103ZET6.35@4375,3994.8 4377.69,3992.12 4403.04,3992.12 ; v1(4465,3985) 4410.16,3985 4403.04,3992.12 ; v1(4615,3985) 5150.3,3985 v1(5209,3926.3) ; STM32F103ZET6.35@4396,3993.8 cw(c4396,3980.87) 4405.14,3990.02 ; STM32F103ZET6.35@4396,3993.8 cw(c4396,3980.87) 4405.14,3990.02 ; STM32F103ZET6.35@4396,3993.8 cw(c4396,3980.87) 4405.14,3990.02 ; STM32F103ZET6.35@4396,3993.8 cw(c4396,3980.87) 4405.14,3990.02 ; STM32F103ZET6.35@4396.28,3993.84 cw(c4398.21,3987.28) 4403.04,3992.12 ; STM32F103ZET6.35@4396.28,3993.84 cw(c4398.21,3987.28) 4403.04,3992.12 ; STM32F103ZET6.35@4396.28,3993.84 cw(c4398.21,3987.28) 4403.04,3992.12 ; STM32F103ZET6.35@4396.28,3993.84 cw(c4398.21,3987.28) 4403.04,3992.12 ; STM32F103ZET6.35@4396.82,3995.37 ccw(c4403.04,3999.69) 4403.04,3992.12 ; STM32F103ZET6.35@4396.82,3995.37 ccw(c4403.04,3999.69) 4403.04,3992.12 ; STM32F103ZET6.35@4396.82,3995.37 ccw(c4403.04,3999.69) 4403.04,3992.12 ; STM32F103ZET6.35@4396.82,3995.37 ccw(c4403.04,3999.69) 4403.04,3992.12 ; 4452.93,3985 cw(c4452.93,3972.93) v1@4461.46,3981.46 ; 4452.93,3985 ccw(c4452.93,3997.07) v1@4461.46,3988.54 ; 4452.93,3985 ccw(c4452.93,3997.07) v1@4461.46,3988.54 ; 4452.93,3985 cw(c4452.93,3972.93) v1@4461.46,3981.46 ; 4452.93,3985 ccw(c4452.93,3997.07) v1@4461.46,3988.54 ; 4452.93,3985 cw(c4452.93,3972.93) v1@4461.46,3981.46 ; 4452.93,3985 ccw(c4452.93,3997.07) v1@4461.46,3988.54 ; 4452.93,3985 cw(c4452.93,3972.93) v1@4461.46,3981.46 ; v1@4618.54,3981.46 cw(c4627.07,3972.93) 4627.07,3985 ; v1@4618.54,3981.46 cw(c4627.07,3972.93) 4627.07,3985 ; v1@4618.54,3981.46 cw(c4627.07,3972.93) 4627.07,3985 ; v1@4618.54,3981.46 cw(c4627.07,3972.93) 4627.07,3985 ; v1@4618.54,3988.54 ccw(c4627.07,3997.07) 4627.07,3985 ; v1@4618.54,3988.54 ccw(c4627.07,3997.07) 4627.07,3985 ; v1@4618.54,3988.54 ccw(c4627.07,3997.07) 4627.07,3985 ; v1@4618.54,3988.54 ccw(c4627.07,3997.07) 4627.07,3985 ; 5200.46,3934.84 cw(c5191.93,3926.3) v1@5204,3926.3 ; 5200.46,3934.84 ccw(c5209,3943.37) v1@5209,3931.3 ; 5200.46,3934.84 ccw(c5209,3943.37) v1@5209,3931.3 ; 5200.46,3934.84 cw(c5191.93,3926.3) v1@5204,3926.3 ; 5200.46,3934.84 ccw(c5209,3943.37) v1@5209,3931.3 ; 5200.46,3934.84 cw(c5191.93,3926.3) v1@5204,3926.3 ; 5200.46,3934.84 ccw(c5209,3943.37) v1@5209,3931.3 ; 5200.46,3934.84 cw(c5191.93,3926.3) v1@5204,3926.3
  Bottom Layer w10: v1(4465,3985) v1(4615,3985) ; R6.1@5209,3656 R7.2@5209,3772 v1(5209,3926.3) ; v1@4468.54,3981.46 cw(c4477.07,3972.93) 4477.07,3985 ; v1@4468.54,3981.46 cw(c4477.07,3972.93) 4477.07,3985 ; v1@4468.54,3981.46 cw(c4477.07,3972.93) 4477.07,3985 ; v1@4468.54,3981.46 cw(c4477.07,3972.93) 4477.07,3985 ; v1@4468.54,3988.54 ccw(c4477.07,3997.07) 4477.07,3985 ; v1@4468.54,3988.54 ccw(c4477.07,3997.07) 4477.07,3985 ; v1@4468.54,3988.54 ccw(c4477.07,3997.07) 4477.07,3985 ; v1@4468.54,3988.54 ccw(c4477.07,3997.07) 4477.07,3985 ; 4602.93,3985 cw(c4602.93,3972.93) v1@4611.46,3981.46 ; 4602.93,3985 ccw(c4602.93,3997.07) v1@4611.46,3988.54 ; 4602.93,3985 ccw(c4602.93,3997.07) v1@4611.46,3988.54 ; 4602.93,3985 cw(c4602.93,3972.93) v1@4611.46,3981.46 ; 4602.93,3985 ccw(c4602.93,3997.07) v1@4611.46,3988.54 ; 4602.93,3985 cw(c4602.93,3972.93) v1@4611.46,3981.46 ; 4602.93,3985 ccw(c4602.93,3997.07) v1@4611.46,3988.54 ; 4602.93,3985 cw(c4602.93,3972.93) v1@4611.46,3981.46 ; R7.2@5201.22,3764.22 cw(c5182.44,3745.44) 5209,3745.44 ; R7.2@5201.22,3764.22 cw(c5182.44,3745.44) 5209,3745.44 ; R7.2@5201.22,3764.22 cw(c5182.44,3745.44) 5209,3745.44 ; R7.2@5201.22,3764.22 cw(c5182.44,3745.44) 5209,3745.44 ; R7.2@5201.22,3779.78 ccw(c5182.44,3798.56) 5209,3798.56 ; R7.2@5201.22,3779.78 ccw(c5182.44,3798.56) 5209,3798.56 ; R7.2@5201.22,3779.78 ccw(c5182.44,3798.56) 5209,3798.56 ; R7.2@5201.22,3779.78 ccw(c5182.44,3798.56) 5209,3798.56 ; R6.1@5204.22,3660.78 ccw(c5192.69,3672.31) 5209,3672.31 ; R6.1@5204.22,3660.78 ccw(c5192.69,3672.31) 5209,3672.31 ; R6.1@5204.22,3660.78 ccw(c5192.69,3672.31) 5209,3672.31 ; R6.1@5204.22,3660.78 ccw(c5192.69,3672.31) 5209,3672.31 ; R6.1@5204.22,3660.78 ccw(c5192.69,3672.31) 5209,3672.31 ; R6.1@5204.22,3660.78 ccw(c5192.69,3672.31) 5209,3672.31 ; R6.1@5204.22,3660.78 ccw(c5192.69,3672.31) 5209,3672.31 ; v1@5205.46,3922.77 cw(c5196.93,3914.23) 5209,3914.23 ; v1@5205.46,3922.77 cw(c5196.93,3914.23) 5209,3914.23 ; v1@5205.46,3922.77 cw(c5196.93,3914.23) 5209,3914.23 ; v1@5205.46,3922.77 cw(c5196.93,3914.23) 5209,3914.23 ; 5209,3686.8 ccw(c5245.8,3686.8) R6.1@5219.78,3660.78 ; 5209,3686.8 ccw(c5245.8,3686.8) R6.1@5219.78,3660.78 ; 5209,3686.8 ccw(c5245.8,3686.8) R6.1@5219.78,3660.78 ; 5209,3686.8 ccw(c5245.8,3686.8) R6.1@5219.78,3660.78 ; 5209,3686.8 ccw(c5245.8,3686.8) R6.1@5219.78,3660.78 ; 5209,3686.8 ccw(c5245.8,3686.8) R6.1@5219.78,3660.78 ; 5209,3686.8 ccw(c5245.8,3686.8) R6.1@5219.78,3660.78 ; 5209,3745.44 cw(c5235.56,3745.44) R7.2@5216.78,3764.22 ; 5209,3745.44 cw(c5235.56,3745.44) R7.2@5216.78,3764.22 ; 5209,3745.44 cw(c5235.56,3745.44) R7.2@5216.78,3764.22 ; 5209,3745.44 cw(c5235.56,3745.44) R7.2@5216.78,3764.22 ; 5209,3798.56 ccw(c5235.56,3798.56) R7.2@5216.78,3779.78 ; 5209,3798.56 ccw(c5235.56,3798.56) R7.2@5216.78,3779.78 ; 5209,3798.56 ccw(c5235.56,3798.56) R7.2@5216.78,3779.78 ; 5209,3798.56 ccw(c5235.56,3798.56) R7.2@5216.78,3779.78 ; 5209,3914.23 cw(c5221.07,3914.23) v1@5212.54,3922.77 ; 5209,3914.23 cw(c5221.07,3914.23) v1@5212.54,3922.77 ; 5209,3914.23 cw(c5221.07,3914.23) v1@5212.54,3922.77 ; 5209,3914.23 cw(c5221.07,3914.23) v1@5212.54,3922.77